# EAGLE board 3phasig_ATmega (EAGLE 6.1), part 1 of 2
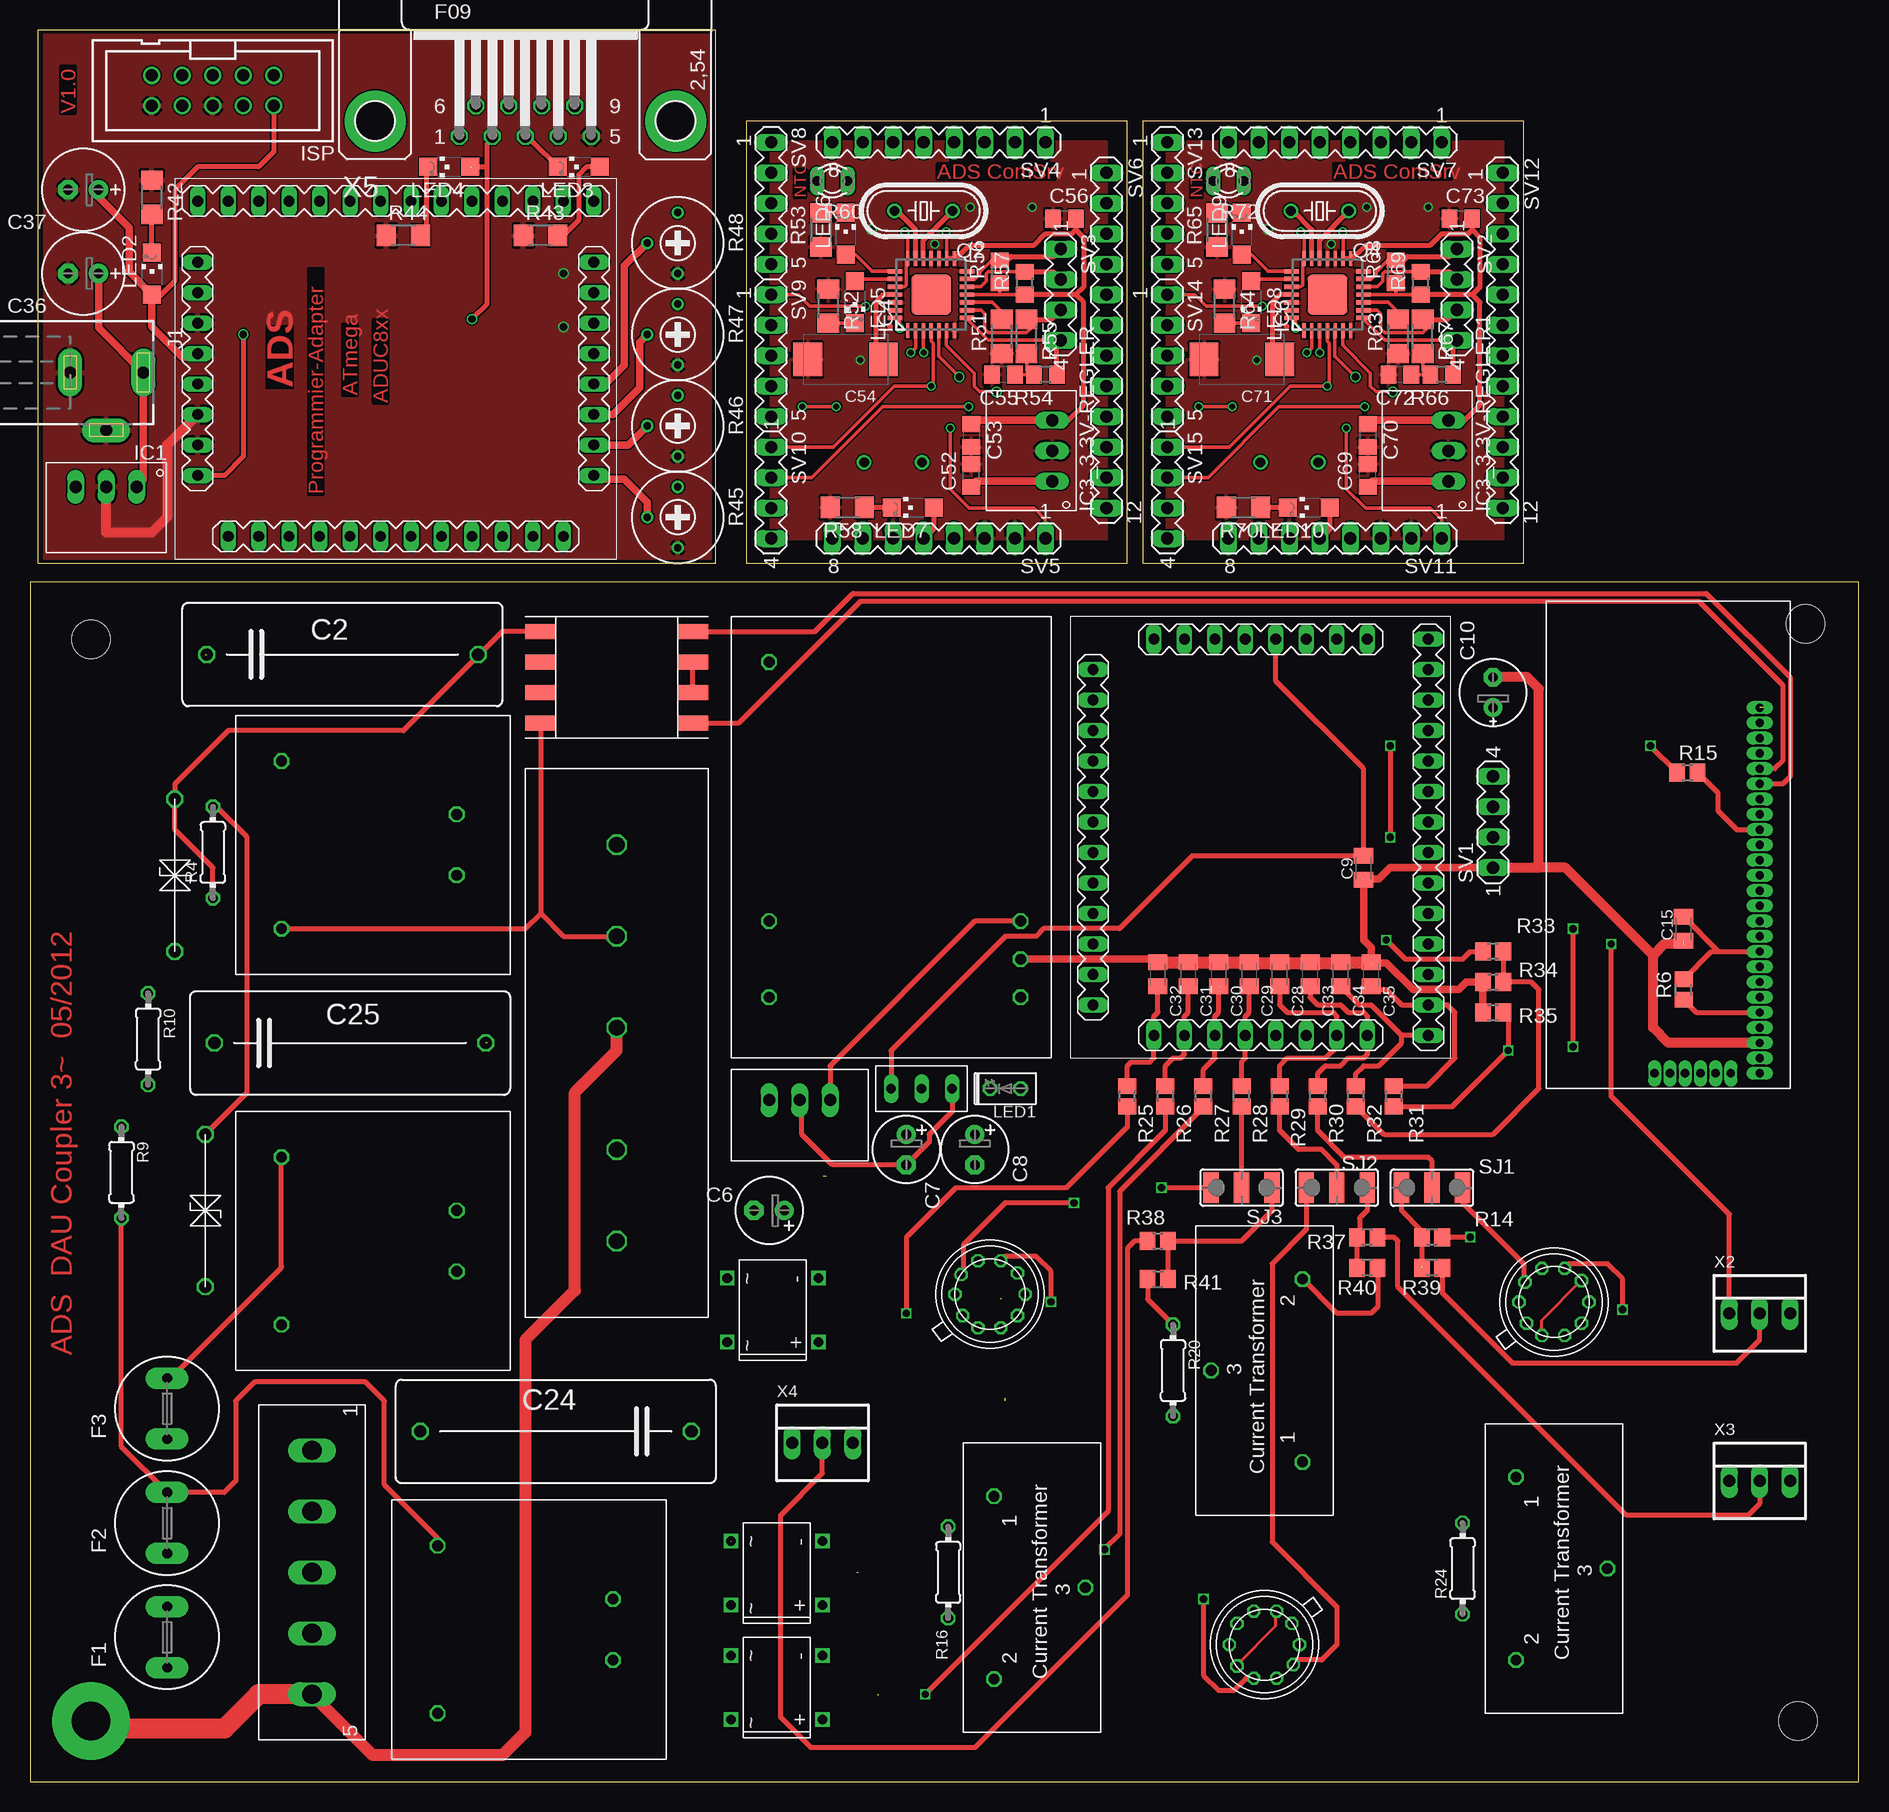
[diagram p0: board, top side]
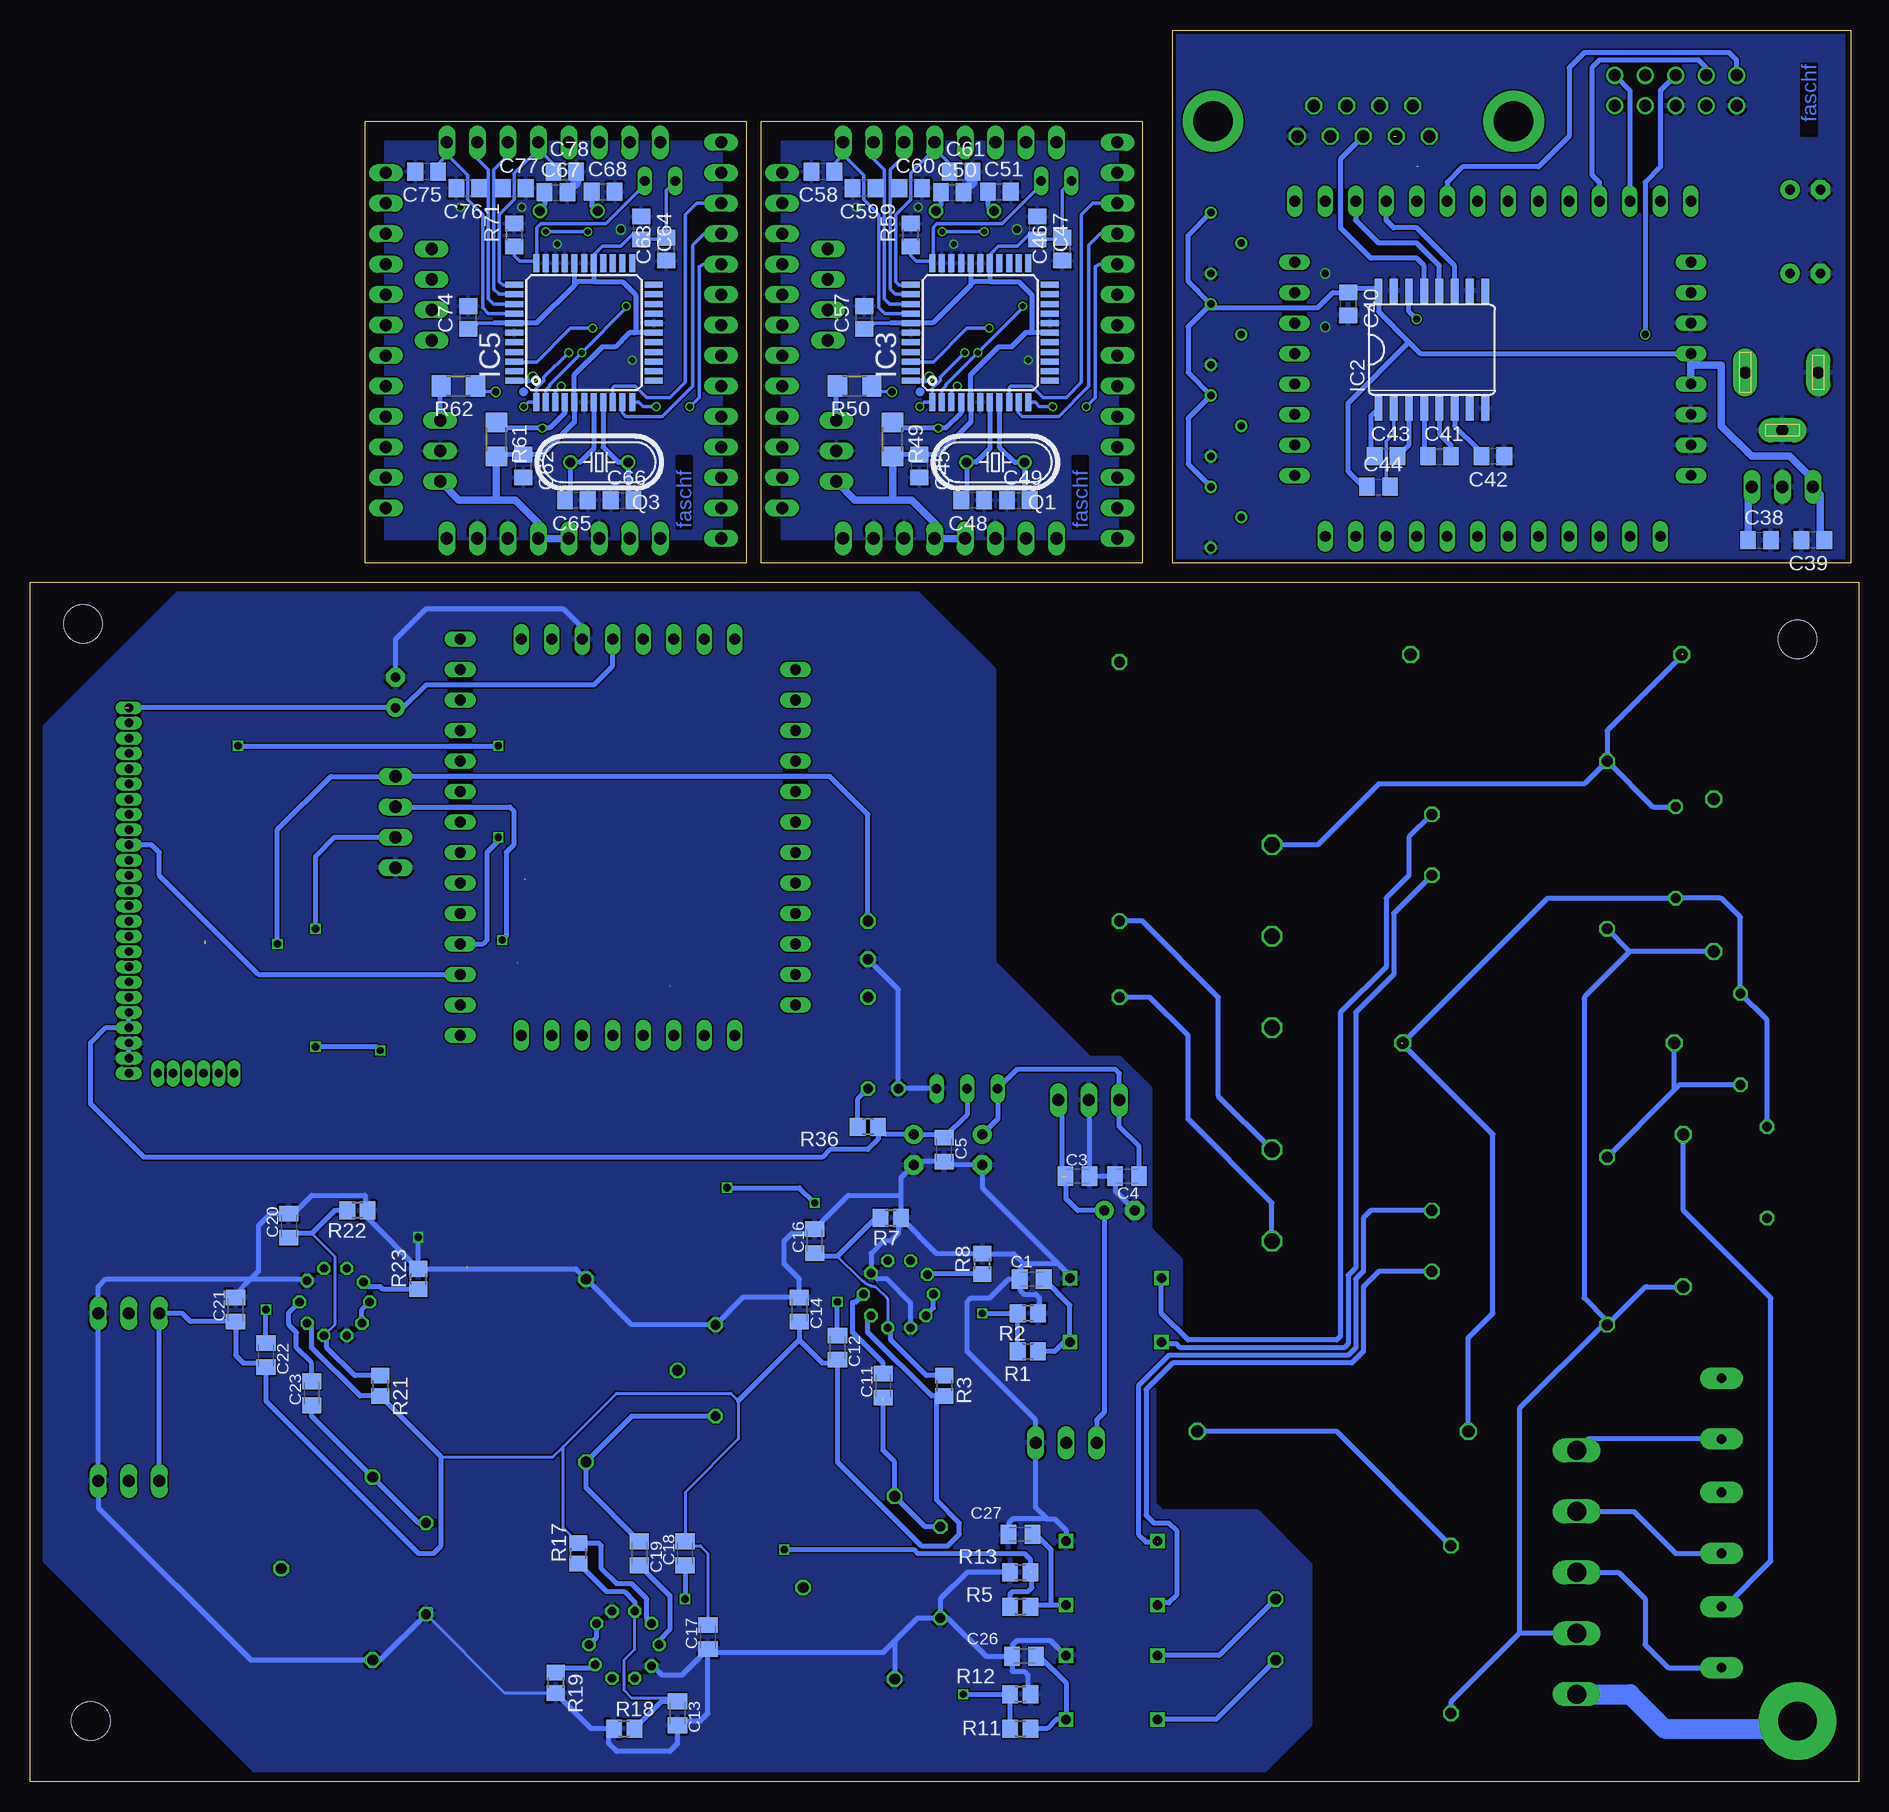
[diagram p1: board, bottom side, seen from below]

Size 152.38 x 146.03 mm. Coordinates in mm from the lower left corner, seen from the top.
Outline: 0,0 152.38,0 152.38,100 0,100 0,0
Outline: 91.44,138.43 59.69,138.43 59.69,101.6 91.44,101.6 91.44,138.43
Outline: 124.46,138.43 92.71,138.43 92.71,101.6 124.46,101.6 124.46,138.43
Outline: 57.15,101.6 57.15,146.03 0.65,146.03 0.65,101.6 57.15,101.6
Copper layers (1*16): Top 0.035mm / dielectric 1.5mm / Bottom 0.035mm
Design rules: minimum track width 0.125mm, minimum drill 0.2mm, track to track 0.125mm, track to pad 0.125mm, pad to pad 0.125mm, via to via 0.125mm, smd to smd 0.125mm, copper to edge 0.3mm, drill to drill 0.2mm, minimum pad ring 0.2mm, minimum via ring 0.125mm, stop-mask expansion 0.075mm, vias tented up to drill 0mil, thermal gap 0.2mm
Holes 3.2 mm at 147.96,96.52 147.32,5.08 5.08,95.25

## Footprints (pad centres in the part's own frame; a part is rotated, then mirrored left to right if it is on the bottom)
AC1010 = drill 0.9 octagon: P$1 20.32,8.89; P$2 5.08,8.89; P$3 12.7,1.27
C0805K = smd 1.3 x 1.6: 1 -1,0; 2 1,0
C225-087X268 = drill 1.016 octagon: 1 -11.303,0; 2 11.303,0
E2,5-6 = drill 0.813 pad 1.6: + -1.27,0 | drill 0.813 pad 1.6 octagon: - 1.27,0
E2,5-6E = drill 0.813 pad 1.575: + -1.27,0 | drill 0.813 pad 1.575 octagon: - 1.27,0
E2,5-7 = drill 0.813 pad 1.6: + -1.27,0 | drill 0.813 pad 1.6 octagon: - 1.27,0
C0805 = smd 1.3 x 1.5: 1 -0.95,0; 2 0.95,0
SMC_D = smd 2.4 x 2.8: + -3.15,0; - 3.15,0
TR5 = drill 0.813 pad 1.778 long: 1 -2.54,0; 2 2.54,0
RECOM_3POL = drill 1.016 long: 1 -2.54,0; 2 0,0; 3 2.54,0
SO16L = smd 0.66 x 2.032: 1 -4.445,-4.902; 2 -3.175,-4.902; 3 -1.905,-4.902; 4 -0.635,-4.902; 5 0.635,-4.902; 6 1.905,-4.902; 7 3.175,-4.902; 8 4.445,-4.902; 9 4.445,4.902; 10 3.175,4.902; 11 1.905,4.902; 12 0.635,4.902; 13 -0.635,4.902; 14 -1.905,4.902; 15 -3.175,4.902; 16 -4.445,4.902
TQFP44 = smd 1.5 x 0.5: 1 -5.8,4; 2 -5.8,3.2; 3 -5.8,2.4; 4 -5.8,1.6; 5 -5.8,0.8; 6 -5.8,0; 7 -5.8,-0.8; 8 -5.8,-1.6; 9 -5.8,-2.4; 10 -5.8,-3.2; 11 -5.8,-4; 23 5.8,-4; 24 5.8,-3.2; 25 5.8,-2.4; 26 5.8,-1.6; 27 5.8,-0.8; 28 5.8,0; 29 5.8,0.8; 30 5.8,1.6; 31 5.8,2.4; 32 5.8,3.2; 33 5.8,4 | smd 0.5 x 1.5: 12 -4,-5.8; 13 -3.2,-5.8; 14 -2.4,-5.8; 15 -1.6,-5.8; 16 -0.8,-5.8; 17 0,-5.8; 18 0.8,-5.8; 19 1.6,-5.8; 20 2.4,-5.8; 21 3.2,-5.8; 22 4,-5.8; 34 4,5.8; 35 3.2,5.8; 36 2.4,5.8; 37 1.6,5.8; 38 0.8,5.8; 39 0,5.8; 40 -0.8,5.8; 41 -1.6,5.8; 42 -2.4,5.8; 43 -3.2,5.8; 44 -4,5.8
QFN28_LONG_ERRLES = smd 1.27 x 0.35: 1 -3,1.95; 2 -3,1.3; 3 -3,0.65; 4 -3,0; 5 -3,-0.65; 6 -3,-1.3; 7 -3,-1.95; 15 3,-1.95; 16 3,-1.3; 17 3,-0.65; 18 3,0; 19 3,0.65; 20 3,1.3; 21 3,1.95 | smd 0.35 x 1.27: 8 -1.95,-3; 9 -1.3,-3; 10 -0.65,-3; 11 0,-3; 12 0.65,-3; 13 1.3,-3; 14 1.95,-3; 22 1.95,3; 23 1.3,3; 24 0.65,3; 25 0,3; 26 -0.65,3; 27 -1.3,3; 28 -1.95,3 | smd 3.302 x 3.302: EXP 0,0
PAK100/2500-10 = drill 1 pad 1.422: 1 -5.08,-1.27; 2 -5.08,1.27; 3 -2.54,-1.27; 4 -2.54,1.27; 5 0,-1.27; 6 0,1.27; 7 2.54,-1.27; 8 2.54,1.27; 9 5.08,-1.27; 10 5.08,1.27
DCJ0202 = drill 1 pad 2 long: 1 0,3.1; 2 4.8,0; 3 0,-3
LED2X5 = drill 0.813 octagon: A -1.27,0; K 1.27,0
CHIPLED_1206 = smd 1.5 x 1.5: A 0,-1.75; C 0,1.75
TSV = drill 1 octagon: P$1 -5.08,0; P$2 7.62,0
HC49/S = drill 0.813: 1 -2.413,0; 2 2.413,0
R0805 = smd 1.3 x 1.5: 1 -0.85,0; 2 0.85,0
0204/7 = drill 0.813 octagon: 1 -3.81,0; 2 3.81,0
R1206 = smd 1.6 x 1.803: 1 -1.422,0; 2 1.422,0
RTRIM3339P = drill 0.61: 1 -2.54,0; 2 0,-2.54; 3 2.54,0
R0805' = smd 1.3 x 1.5: 1 -0.95,0; 2 0.95,0
P640 = drill 0.813 long: 1 -1.27,0; 2 1.27,0
SJ_2W = smd 1.27 x 2.54: 1 -2.54,0; 2 0,0; 3 2.54,0
MA04-1 = drill 1.016 long: 1 -3.81,0; 2 -1.27,0; 3 1.27,0; 4 3.81,0
MA08-1 = drill 1.016 long: 1 -8.89,0; 2 -6.35,0; 3 -3.81,0; 4 -1.27,0; 5 1.27,0; 6 3.81,0; 7 6.35,0; 8 8.89,0
MA12-1 = drill 1.016 long: 1 -13.97,0; 2 -11.43,0; 3 -8.89,0; 4 -6.35,0; 5 -3.81,0; 6 -1.27,0; 7 1.27,0; 8 3.81,0; 9 6.35,0; 10 8.89,0; 11 11.43,0; 12 13.97,0
MA05-1 = drill 1.016 long: 1 -5.08,0; 2 -2.54,0; 3 0,0; 4 2.54,0; 5 5.08,0
RAC04_12SA = drill 0.9 octagon: +VO 25.4,24.13; GND 28.575,24.13; L 31.75,3.175; N 25.4,3.175; NC 3.81,3.175; NC1 31.75,24.13
TRAFO_0,35VA = drill 0.9 octagon: L 3.81,17.78; N 3.81,3.81; OUT1 18.415,13.335; OUT2 18.415,8.255
ADUC_MINIMUM = drill 0.9 long: ADC0 -9.207,-16.51; ADC1 -6.668,-16.51; ADC2 -4.128,-16.51; ADC3 -1.587,-16.51; ADC4 6.032,-16.51; ADC5 8.572,-16.51; ADC6 13.652,-16.51; ADC7 13.652,-13.97; ALE -14.287,6.35; DAC0 0.953,-16.51; DAC1 3.493,-16.51; GND 3.493,16.51; GND2 -4.128,16.51; GND3 -6.668,16.51; INT0 13.652,-6.35; MISO 13.652,-3.81; MOSI 13.652,11.43; P00 -14.287,3.81; P01 -14.287,1.27; P02 -14.287,-1.27; P03 -14.287,-3.81; P04 -14.287,-6.35; P05 -14.287,-8.89; P06 -14.287,-11.43; P07 -14.287,-13.97; P20 13.652,13.97; P21 13.652,16.51; P22 8.572,16.51; P23 6.032,16.51; P24 -9.207,16.51; P25 -14.287,13.97; P34 13.652,-1.27; P35 13.652,1.27; P36 13.652,3.81; P37 13.652,6.35; PWM0 -14.287,11.43; PWM1 -14.287,8.89; RXD 13.652,-11.43; SCLOCK 13.652,8.89; TXD 13.652,-8.89; VCC 0.953,16.51; VCC1 -1.587,16.51
MODEM_FUSS = drill 0.7 pad 0.813 long: P$1 -20.32,-8.89; P$2 -19.05,-8.89; P$3 -17.78,-8.89; P$4 -16.51,-8.89; P$5 -15.24,-8.89; P$6 -13.97,-8.89; P$7 -12.7,-8.89; P$8 -11.43,-8.89; P$9 -10.16,-8.89; P$10 -8.89,-8.89; P$11 -7.62,-8.89; P$12 -6.35,-8.89; P$13 -5.08,-8.89; P$14 -3.81,-8.89; P$15 -2.54,-8.89; P$16 -1.27,-8.89; P$17 0,-8.89; P$18 1.27,-8.89; P$19 2.54,-8.89; P$20 3.81,-8.89; P$21 5.08,-8.89; P$22 6.35,-8.89; P$23 7.62,-8.89; P$24 8.89,-8.89; P$25 10.16,-8.89; P$29 -20.32,-3.937; P$30 -20.32,-5.207; P$31 -20.32,-6.477 | drill 0.7 pad 0.61 long: P$26 -20.32,-0.127; P$27 -20.32,-1.397; P$28 -20.32,-2.667
PLC-UEBERTRAGER_V2 = smd 2.54 x 1.27: 1LINE1 6.35,3.81; 2 6.35,1.27; 3 6.35,-1.27; 4LINE2 6.35,-3.81; 6NC -6.35,1.27; 7NC -6.35,-1.27; 8N -6.35,-3.81; L5 -6.35,3.81
RECTIFIER = drill 0.8 square: + 6.858,7.62; - 1.524,7.62; ~1 1.524,0; ~2 6.858,0
RECOM785X = drill 1 long: GND 0,2.54; VIN -2.54,2.54; VOUT 2.54,2.54
TS1084_HOCH = drill 0.8 long: GND 0,0; IN 5.08,0; OUT 2.54,0
TO100_10PIN = drill 0.7 octagon: 1 2.794,-1.016; 2 2.794,0.889; 3 1.778,2.286; 4 0,2.921; 5 -1.778,2.286; 6 -2.794,0.889; 7 -2.794,-1.016; 8 -1.651,-2.413; 9 0,-2.921; 10 1.778,-2.286
NETZFILTER = drill 1.3 octagon: L 6.35,7.62; L' 39.37,7.62; N 13.97,7.62; N' 31.75,7.62; PE 21.59,7.62
CONNECTOR_5_POL = drill 1.6 long: P$1 3.81,4.445; P$2 8.89,4.445; P$3 13.97,4.445; P$4 19.05,4.445; P$5 24.13,4.445
22-23-2031 = drill 1 long: 1 -2.54,0; 2 0,0; 3 2.54,0
F09HP = drill 1.016 octagon: 1 -5.486,-1.27; 2 -2.743,-1.27; 3 0,-1.27; 4 2.743,-1.27; 5 5.486,-1.27; 6 -4.115,1.27; 7 -1.372,1.27; 8 1.372,1.27; 9 4.115,1.27 | drill 3.302 pad 5.08: G1 -12.522,0; G2 12.522,0

## Placement (x,y rotation side)
AC1002_1  AC1010  [AC1010]  89.22,3.49 90 top
C1  1µ  [C0805K]  68.9,41.91 180 bottom
C2  470n/270V  [C225-087X268]  26.04,93.98 0 top
C3  100n  [C0805K]  65.09,50.48 0 bottom
C4  100n  [C0805K]  60.96,50.48 180 bottom
C5  100n  [C0805K]  76.2,52.7 270 bottom
C6  4,7µ  [E2,5-6]  61.59,47.62 180 top
C7  4,7µ  [E2,5-6]  73.03,52.7 270 top
C8  4,7µ  [E2,5-6]  78.74,52.7 270 top
C9  100n  [C0805K]  111.12,76.2 90 top
C10  4µ7  [E2,5-6E]  121.92,90.81 90 top
C11  1µ  [C0805K]  81.28,33.02 90 bottom
C12  4µ7  [C0805K]  85.09,36.2 270 bottom
C13  1µ  [C0805K]  98.42,5.71 270 bottom
C14  1µ  [C0805K]  88.27,39.37 270 bottom
C15  1µ  [C0805K]  137.79,71.12 90 top
C16  1µ  [C0805K]  87,45.09 90 bottom
C17  1µ  [C0805K]  95.89,12.06 90 bottom
C18  4µ7  [C0805K]  97.79,19.05 90 bottom
C19  1µ  [C0805K]  101.6,19.05 270 bottom
C20  1µ  [C0805K]  130.81,46.35 90 bottom
C21  1µ  [C0805K]  135.25,39.37 90 bottom
C22  4µ7  [C0805K]  132.72,35.56 270 bottom
C23  1µ  [C0805K]  128.91,32.38 90 bottom
C24  470n/270V  [C225-087X268]  43.81,29.21 180 top
C25  470n/270V  [C225-087X268]  26.67,61.59 0 top
C26  1µ  [C0805K]  69.53,10.48 180 bottom
C27  1µ  [C0805K]  69.85,20.64 180 bottom
C28  100n  [C0805K]  104.14,67.31 90 top
C29  100n  [C0805K]  101.6,67.31 90 top
C30  100n  [C0805K]  99.06,67.31 90 top
C31  100n  [C0805K]  96.52,67.31 90 top
C32  100n  [C0805K]  93.98,67.31 90 top
C33  100n  [C0805K]  106.68,67.31 90 top
C34  100n  [C0805K]  109.22,67.31 90 top
C35  100n  [C0805K]  111.76,67.31 90 top
C36  10u  [E2,5-7]  4.45,125.73 180 top
C37  10u  [E2,5-7]  4.45,132.72 180 top
C38  100n  [C0805]  8.26,103.5 0 bottom
C39  100n  [C0805]  3.81,103.5 180 bottom
C40  100n  [C0805]  42.55,123.19 270 bottom
C41  100n  [C0805]  34.92,110.49 0 bottom
C42  100n  [C0805]  30.48,110.49 180 bottom
C43  100n  [C0805]  39.37,110.49 0 bottom
C44  100n  [C0805]  40.01,107.95 0 bottom
C45  100n  [C0805]  78.27,109.68 270 bottom
C46  100n  [C0805]  66.35,127.77 90 bottom
C47  100n  [C0805]  68.43,129.53 270 bottom
C48  22p  [C0805]  73.83,106.82 180 bottom
C49  22p  [C0805]  70.02,106.82 0 bottom
C50  22p  [C0805]  75.53,132.49 0 bottom
C51  22p  [C0805]  71.6,132.55 0 bottom
C52  100n  [C0805]  78.45,108.89 90 top
C53  100n  [C0805]  78.45,112.23 270 top
C54  10u  [SMC_D]  67.97,118.56 180 top
C55  10n  [C0805]  81.13,117.3 180 top
C56  10n  [C0805]  86.21,130.32 0 top
C57  100n  [C0805]  82.85,122.06 90 bottom
C58  10n  [C0805]  86.31,134.23 180 bottom
C59  10n  [C0805]  82.88,132.83 180 bottom
C60  10n  [C0805]  78.99,132.83 0 bottom
C61  10n  [C0805]  74.79,134.23 0 bottom
C62  100n  [C0805]  111.29,109.68 270 bottom
C63  100n  [C0805]  99.37,127.77 90 bottom
C64  100n  [C0805]  101.45,129.53 270 bottom
C65  22p  [C0805]  106.85,106.82 180 bottom
C66  22p  [C0805]  103.04,106.82 0 bottom
C67  22p  [C0805]  108.55,132.49 0 bottom
C68  22p  [C0805]  104.62,132.55 0 bottom
C69  100n  [C0805]  111.47,108.89 90 top
C70  100n  [C0805]  111.47,112.23 270 top
C71  10u  [SMC_D]  100.99,118.56 180 top
C72  10n  [C0805]  114.15,117.3 180 top
C73  10n  [C0805]  119.23,130.32 0 top
C74  100n  [C0805]  115.87,122.06 90 bottom
C75  10n  [C0805]  119.33,134.23 180 bottom
C76  10n  [C0805]  115.9,132.83 180 bottom
C77  10n  [C0805]  112.01,132.83 0 bottom
C78  10n  [C0805]  107.81,134.23 0 bottom
F1  T250mA/240V  [TR5]  11.43,12.06 90 top
F2  T250mA/240V  [TR5]  11.43,21.59 90 top
F3  T250mA/240V  [TR5]  11.43,31.11 90 top
IC1  78RECOM  [RECOM_3POL]  6.35,107.95 180 top
IC2  MAX3232CWE  [SO16L]  35.56,119.38 0 bottom
IC3  MEGA32-A  [TQFP44]  73.19,120.79 90 bottom
IC3_3.3V-REGLER  78RECOM  [RECOM_3POL]  85.18,110.95 90 top
IC3_3.3V-REGLER1  78RECOM  [RECOM_3POL]  118.2,110.95 90 top
IC4  ENC28J60QFN28_LONG_28  [QFN28_LONG_ERRLES]  75.1,123.97 90 top
IC5  MEGA32-A  [TQFP44]  106.21,120.79 90 bottom
IC6  ENC28J60QFN28_LONG_28  [QFN28_LONG_ERRLES]  108.12,123.97 90 top
ISP  2510-  [PAK100/2500-10]  15.24,140.97 180 top
J1  DCJ0202  [DCJ0202]  6.35,117.47 270 top
LED1  [LED2X5]  81.28,57.78 180 top
LED2  [CHIPLED_1206]  10.16,125.73 0 top
LED3  [CHIPLED_1206]  45.72,134.62 90 top
LED4  [CHIPLED_1206]  34.92,134.62 90 top
LED5  [CHIPLED_1206]  68.75,123.33 180 top
LED6  [CHIPLED_1206]  67.97,129.05 0 top
LED7  [CHIPLED_1206]  73.55,106.23 90 top
LED8  [CHIPLED_1206]  101.77,123.33 180 top
LED9  [CHIPLED_1206]  100.99,129.05 0 top
LED10  [CHIPLED_1206]  106.57,106.23 90 top
P6KE300CA  P6KE300CA  [TSV]  14.61,48.9 270 top
Q1  16MHz  [HC49/S]  71.92,110 180 bottom
Q2  25MHz  [HC49/S]  74.46,130.95 180 top
Q3  16MHz  [HC49/S]  104.94,110 180 bottom
Q4  25MHz  [HC49/S]  107.48,130.95 180 top
R1  82k  [R0805]  69.22,35.88 0 bottom
R2  33k  [R0805]  69.22,39.05 180 bottom
R3  22k  [R0805]  76.2,33.02 270 bottom
R4  470k  [0204/7]  15.24,77.47 90 top
R5  82k  [R0805]  69.85,14.61 0 bottom
R6  1M  [R0805]  137.79,66.04 90 top
R7  10k  [R0805]  80.64,46.99 180 bottom
R8  4k7  [R0805]  73.03,43.18 90 bottom
R9  470k  [0204/7]  7.62,50.8 270 top
R10  470k  [0204/7]  9.84,61.91 270 top
R11  82k  [R0805]  69.85,4.45 0 bottom
R12  33k  [R0805]  69.85,7.3 180 bottom
R13  33k  [R0805]  69.85,17.46 0 bottom
R14  220R/33k  [R0805]  116.84,45.4 180 top
R15  330R  [R0805]  138.11,84.14 0 top
R16  68R  [0204/7]  76.52,17.46 90 top
R17  22k  [R0805]  106.68,19.05 90 bottom
R18  10k  [R0805]  102.87,4.45 0 bottom
R19  4k7  [R0805]  108.58,8.26 270 bottom
R20  68R  [0204/7]  95.25,34.29 270 top
R21  22k  [R0805]  123.19,33.02 270 bottom
R22  10k  [R0805]  125.09,47.62 180 bottom
R23  4k7  [R0805]  120.02,41.91 90 bottom
R24  68R  [0204/7]  119.38,17.78 90 top
R25  10R  [R0805]  91.44,57.15 90 top
R26  10R  [R0805]  94.61,57.15 90 top
R27  10R  [R0805]  97.79,57.15 90 top
R28  10R  [R0805]  100.97,57.15 90 top
R29  10R  [R0805]  104.14,57.15 90 top
R30  10R  [R0805]  107.31,57.15 90 top
R31  10R  [R0805]  113.67,57.15 90 top
R32  10R  [R0805]  110.49,57.15 90 top
R33  680k  [R0805]  121.92,69.22 180 top
R34  470k  [R0805]  121.92,66.67 0 top
R35  220R  [R0805]  121.92,64.14 0 top
R36  330R  [R0805]  82.55,54.61 180 bottom
R37  0/82k  [R0805]  111.44,45.4 180 top
R38  0/82k  [R0805]  93.98,45.09 0 top
R39  0/82k  [R0805]  116.84,42.86 180 top
R40  220R/33k  [R0805]  111.44,42.86 180 top
R41  220R/33k  [R0805]  93.98,41.91 0 top
R42  220R  [R1206]  10.16,132.08 270 top
R43  1k2  [R1206]  42.55,128.91 0 top
R44  1k2  [R1206]  31.11,128.91 0 top
R45  100k  [RTRIM3339P]  53.98,105.41 270 top
R46  100k  [RTRIM3339P]  53.98,113.03 270 top
R47  100k  [RTRIM3339P]  53.98,120.65 270 top
R48  100k  [RTRIM3339P]  53.98,128.27 270 top
R49  10k  [R1206]  80.5,111.9 270 bottom
R50  10k  [R1206]  83.66,116.38 180 bottom
R51  2k2  [R1206]  80.98,120.48 90 top
R52  220R  [R1206]  66.53,123.02 270 top
R53  220R  [R1206]  65.9,129.37 90 top
R54  51R  [R0805']  84.62,117.3 180 top
R55  51R  [R1206]  83.04,120.48 270 top
R56  51R  [R0805']  80.81,125.87 90 top
R57  51R  [R0805']  82.89,124.92 90 top
R58  220R  [R1206]  68.1,106.23 180 top
R59  10k  [R0805']  78.99,128.94 90 bottom
R60  [P640]  66.86,133.45 180 top
R61  10k  [R1206]  113.52,111.9 270 bottom
R62  10k  [R1206]  116.68,116.38 180 bottom
R63  2k2  [R1206]  114,120.48 90 top
R64  220R  [R1206]  99.55,123.02 270 top
R65  220R  [R1206]  98.92,129.37 90 top
R66  51R  [R0805']  117.64,117.3 180 top
R67  51R  [R1206]  116.06,120.48 270 top
R68  51R  [R0805']  113.83,125.87 90 top
R69  51R  [R0805']  115.91,124.92 90 top
R70  220R  [R1206]  101.12,106.23 180 top
R71  10k  [R0805']  112.01,128.94 90 bottom
R72  [P640]  99.88,133.45 180 top
SJ1  [SJ_2W]  116.84,49.53 0 top
SJ2  [SJ_2W]  108.9,49.53 180 top
SJ3  [SJ_2W]  100.97,49.53 180 top
SV1  [MA04-1]  121.92,80.01 90 top
SV2  [MA04-1]  118.91,123.97 270 top
SV3  [MA04-1]  85.89,123.97 270 top
SV4  [MA08-1]  75.73,136.67 180 top
SV5  [MA08-1]  75.73,103.65 180 top
SV6  [MA12-1]  89.7,120.16 270 top
SV7  [MA08-1]  108.75,136.67 180 top
SV8  [MA05-1]  61.76,131.59 270 top
SV9  [MA05-1]  61.76,118.89 270 top
SV10  [MA04-1]  61.76,107.46 270 top
SV11  [MA08-1]  108.75,103.65 180 top
SV12  [MA12-1]  122.72,120.16 270 top
SV13  [MA05-1]  94.78,131.59 270 top
SV14  [MA05-1]  94.78,118.89 270 top
SV15  [MA04-1]  94.78,107.46 270 top
TSV2  TSV  [TSV]  12.06,76.83 270 top
U$1  RECOM_RAC04_12SA  [RAC04_12SA]  58.42,97.16 270 top
U$2  SICHERHEITSTRAFO  [TRAFO_0,35VA]  17.14,67.31 0 top
U$3  ADUC831_MINIMUM  [ADUC_MINIMUM]  102.87,78.74 0 top
U$4  MODEMSTECKER  [MODEM_FUSS]  135.25,79.38 90 top
U$5  PLC_UEBERTRAGER_V2  [PLC-UEBERTRAGER_V2]  48.9,92.08 0 top
U$6  MEGA32_COMSERVER  [ADUC_MINIMUM]  30.48,118.11 90 top
U$7  AC1010  [AC1010]  97.16,46.99 270 top
U$8  RECTIFIER  [RECTIFIER]  58.1,43.5 270 top
U$10  RECOM_785_05  [RECOM785X]  64.14,59.37 180 top
U$11  TS1084_HOCH  [TS1084_HOCH]  76.83,57.78 180 top
U$12  AD536  [TO100_10PIN]  102.87,11.43 90 top
U$13  AD536  [TO100_10PIN]  80.01,40.64 270 top
U$14  AC1010  [AC1010]  132.72,5.08 90 top
U$15  AD536  [TO100_10PIN]  127,40.01 270 top
U$16  SICHERHEITSTRAFO  [TRAFO_0,35VA]  30.16,1.91 0 top
U$17  RECTIFIER  [RECTIFIER]  58.42,12.06 270 top
U$18  SICHERHEITSTRAFO  [TRAFO_0,35VA]  17.14,34.29 0 top
U$19  RECTIFIER  [RECTIFIER]  58.42,21.59 270 top
U$20  NETZFILTER_05_A  [NETZFILTER]  41.27,84.45 270 top
X1  CONNECTO_5_POL  [CONNECTOR_5_POL]  19.05,31.43 270 top
X2  22-23-2031  [22-23-2031]  144.15,39.05 0 top
X3  22-23-2031  [22-23-2031]  144.15,25.08 0 top
X4  22-23-2031  [22-23-2031]  66.04,28.26 0 top
X5  [F09HP]  41.27,138.43 0 top

## Library data of the parts
AC1002_1 P6KE300CA TSV2 U$1 U$2 U$4 U$7 U$8 U$10-U$20 X1 = ADS
C1-C9 C11-C35 R1-R41 = resistor
C10 C36-C78 R42-R59 R61-R71 = rcl
F1-F3 = fuse; OC_FARNELL: unknown; OC_NEWARK: unknown
IC1 IC3_3.3V-REGLER IC3_3.3V-REGLER1 = linear
IC2 = maxim
IC3 IC5 = atmel
IC4 IC6 = microchip
ISP = con-3m
J1 = con-jack
LED1-LED10 = led
Q1-Q4 = crystal
R60 R72 = ptc-ntc
SJ1-SJ3 = jumper
SV1 = con-lstb; OC_FARNELL: unknown; OC_NEWARK: unknown
SV2-SV15 = con-lstb
U$3 U$6 = ADS_ADUCBoards
U$5 = ADS1
X2-X4 = con-molex; MF: MOLEX; MPN: 22-23-2031; OC_FARNELL: 1462950; OC_NEWARK: 30C0862
X5 = con-subd

## Nets
1_TD+: IC4.13 R56.2 SV3.1
1_TD+1: IC6.13 R68.2 SV2.1
2_TD-: IC4.12 R57.2 SV3.2
2_TD-1: IC6.12 R69.2 SV2.2
3_RD+: IC4.9 R55.1 SV3.3
3_RD+1: IC6.9 R67.1 SV2.3
6_RD-: IC4.8 R54.1 SV3.4
6_RD-1: IC6.8 R66.1 SV2.4
+3V3: C5.1 C8.+ R6.1 R36.1 U$4.P$4 U$4.P$5 U$11.OUT
+5V: C4.1 C7.+ C9.2 C10.+ U$3.VCC U$4.P$25 U$10.VOUT U$11.IN
+12V: C3.1 C6.+ C12.2 C14.2 C17.2 C18.2 C21.1 C22.2 R3.2 R17.2 R21.2 SV1.4 U$1.+VO U$10.VIN U$12.3 U$13.3 U$15.3 X2.1 X3.1 X4.1
ADC0: C32.1 R25.2 U$3.ADC0
ADC1: C31.1 R26.2 U$3.ADC1
ADC2: C30.1 R27.2 U$3.ADC2
ADC3: C29.1 R28.2 U$3.ADC3
ADC4: C28.1 R29.2 U$3.ADC4
ADC5: C33.1 R30.2 U$3.ADC5
ADC6: C58.1 IC3.37 SV4.1
ADC7: C59.1 IC3.36 SV4.2
ADC8: C60.1 IC3.35 SV4.3
ADC9: C61.1 IC3.34 SV4.4
ADC10: C75.1 IC5.37 SV7.1
ADC11: C76.1 IC5.36 SV7.2
ADC12: C77.1 IC5.35 SV7.3
ADC13: C78.1 IC5.34 SV7.4
GND: AC1002_1.P$2 C1.2 C3.2 C4.2 C5.2 C6.- C7.- C8.- C9.1 C10.- C13.2 C14.1 C15.1 C16.2 C17.1 C20.2 C21.2 C26.2 C27.2 C28.2 C29.2 C30.2 C31.2 C32.2 C33.2 C34.2 C35.2 LED1.K R2.1 R7.1 R8.2 R12.1 R13.1 R14.1 R16.1 R18.1 R19.2 R20.1 R22.1 R23.2 R24.1 R34.1 R35.1 R40.1 R41.1 SV1.1 U$1.GND U$3.GND U$4.P$2 U$4.P$3 U$7.P$2 U$8.- U$10.GND U$11.GND U$12.1 U$12.5 U$13.1 U$13.5 U$14.P$2 U$15.1 U$15.5 U$17.- U$19.- X2.3 X3.3 X4.3
GND1: C36.- C37.- C38.2 C39.2 C40.2 C42.1 IC1.2 IC2.8 IC2.10 IC2.15 ISP.6 ISP.10 J1.2 J1.3 R42.1 R43.1 R44.1 R45.3 R46.3 R47.3 R48.3 U$6.GND U$6.GND2 U$6.GND3 X5.5
GND2: C45.2 C46.1 C47.1 C48.1 C49.1 C50.2 C51.2 C52.2 C53.2 C54.- C55.2 C56.1 C57.2 C58.2 C59.2 C60.2 C61.2 IC3.6 IC3.18 IC3.28 IC3.30 IC3.31 IC3.32 IC3.39 IC3_3.3V-REGLER.2 IC4.7 IC4.14 IC4.17 IC4.18 IC4.26 R51.1 R52.1 R53.1 R58.2 R59.2 SV5.2 SV5.3 SV5.6
GND3: C62.2 C63.1 C64.1 C65.1 C66.1 C67.2 C68.2 C69.2 C70.2 C71.- C72.2 C73.1 C74.2 C75.2 C76.2 C77.2 C78.2 IC3_3.3V-REGLER1.2 IC5.6 IC5.18 IC5.28 IC5.30 IC5.31 IC5.32 IC5.39 IC6.7 IC6.14 IC6.17 IC6.18 IC6.26 R63.1 R64.1 R65.1 R70.2 R71.2 SV11.2 SV11.3 SV11.6
I1: R28.1 SJ3.2
I1INTERN: R8.1 SJ3.3 U$13.8
I2: R29.1 SJ2.2
I2INTERN: R19.1 SJ2.3 U$12.8
I3: R30.1 SJ1.2
I3INTERN: R23.1 SJ1.3 U$15.8
INT0: IC3.11 SV8.5
INT1: IC5.11 SV13.5
L1: C2.1 F1.2 P6KE300CA.P$1 R4.2 U$2.L U$20.L
L2: C24.1 F2.2 R9.2 U$16.L
L3: C25.1 F3.2 R10.2 U$18.L
MISO: IC3.2 IC4.2 SV9.1
MISO1: IC5.2 IC6.2 SV14.1
MOSI: IC3.1 IC4.3 SV10.2
MOSI1: IC5.1 IC6.3 SV15.2
N: P6KE300CA.P$2 TSV2.P$2 U$2.N U$5.8N U$16.N U$18.N U$20.N X1.P$4
N$1: R15.2 U$4.P$17
N$2: AC1002_1.P$1 C11.1 R16.2
N$3: C11.2 U$13.4
N$4: U$2.OUT1 U$8.~1
N$5: U$4.P$20 U$5.1LINE1
N$6: U$13.9 U$13.10
N$7: C1.1 R1.2 U$8.+
N$8: C35.1 R31.2 U$3.ADC7
N$9: U$2.OUT2 U$8.~2
N$10: C26.1 R11.2 U$17.+
N$11: U$16.OUT1 U$17.~1
N$12: U$16.OUT2 U$17.~2
N$13: U$4.P$21 U$5.4LINE2
N$14: R15.1 U$3.TXD
N$15: U$3.RXD U$4.P$16
N$16: U$1.L U$20.L'
N$17: C16.1 R3.1 R7.2 U$13.2
N$18: C36.+ C38.1 IC1.1 J1.1
N$19: LED1.A R36.2
N$20: C15.2 R6.2 U$4.P$9
N$21: C12.1 U$13.6
N$22: C19.1 R20.2 U$7.P$1
N$23: C19.2 U$12.4
N$24: U$12.9 U$12.10
N$25: C34.1 R32.2 U$3.ADC6
N$26: C2.2 C24.2 C25.2 R4.1 R9.1 R10.1 TSV2.P$1 U$5.L5
N$27: C13.1 R17.1 R18.2 U$12.2
N$28: ISP.1 U$6.MOSI
N$29: C18.1 U$12.6
N$30: C23.1 R24.2 U$14.P$1
N$31: C23.2 U$15.4
N$32: U$15.9 U$15.10
N$33: U$5.2 U$5.3
N$34: C27.1 R5.2 U$19.+
N$35: U$18.OUT1 U$19.~1
N$36: U$18.OUT2 U$19.~2
N$37: R33.2 SV1.3
N$38: C20.1 R21.1 R22.2 U$15.2
N$39: ISP.5 U$6.P24
N$40: C22.1 U$15.6
N$41: U$1.N U$20.N'
N$42: R37.2 R40.2 SJ2.1
N$43: R37.1 X3.2
N$45: R14.2 R39.2 SJ1.1
N$46: F1.1 X1.P$3
N$47: F2.1 X1.P$2
N$48: F3.1 X1.P$1
N$49: R32.1 R33.1 R34.2
N$50: R31.1 R35.2 SV1.2
N$53: R39.1 X2.2
N$54: R38.2 R41.2 SJ3.1
N$55: R38.1 X4.2
N$56: ISP.7 U$6.SCLOCK
N$57: ISP.9 U$6.MISO
N$58: IC2.12 U$6.RXD
N$59: IC2.11 U$6.TXD
N$60: C44.2 IC2.2
N$61: C42.2 IC2.6
N$62: C43.1 IC2.1
N$63: C43.2 IC2.3
N$64: C41.1 IC2.4
N$65: C41.2 IC2.5
N$66: IC2.14 LED4.A X5.2
N$67: LED2.C R42.2
N$68: IC2.13 LED3.C X5.3
N$69: LED3.A R43.2
N$70: LED4.C R44.2
N$71: R45.2 U$6.ADC0
N$72: R46.2 U$6.ADC1
N$73: R47.2 U$6.ADC2
N$74: R48.2 U$6.ADC3
N$75: C49.2 IC3.8 Q1.1
N$76: C48.2 IC3.7 Q1.2
N$77: C50.1 IC4.19 Q2.1
N$78: C51.1 IC4.20 Q2.2
N$79: C54.+ IC4.25
N$80: IC3.42 IC4.28
N$81: IC4.6 R50.1
N$82: IC4.10 R51.2
N$83: LED5.C R52.2
N$84: IC4.23 LED5.A
N$85: IC4.22 LED6.A
N$86: LED6.C R53.2
N$87: C55.1 R54.2 R55.2
N$88: LED7.C R58.1
N$89: IC3.33 R59.1 R60.1
N$90: C66.2 IC5.8 Q3.1
N$91: C65.2 IC5.7 Q3.2
N$92: C67.1 IC6.19 Q4.1
N$93: C68.1 IC6.20 Q4.2
N$94: C71.+ IC6.25
N$95: IC5.42 IC6.28
N$96: IC6.6 R62.1
N$97: IC6.10 R63.2
N$98: LED8.C R64.2
N$99: IC6.23 LED8.A
N$100: IC6.22 LED9.A
N$101: LED9.C R65.2
N$102: C72.1 R66.2 R67.2
N$103: LED10.C R70.1
N$104: IC5.33 R71.1 R72.1
PE: U$20.PE X1.P$5
RESET: IC3.4 R49.1 SV5.1
RESET1: IC5.4 R61.1 SV11.1
RXD: IC3.9 SV8.3
RXD1: IC5.9 SV13.3
SCK: IC3.3 IC4.4 SV10.1
SCK1: IC5.3 IC6.4 SV15.1
SS: IC3.44 IC4.5
SS1: IC5.44 IC6.5
TXD: IC3.10 SV8.4
TXD1: IC5.10 SV13.4
U1: R1.1 R2.2 R25.1
U2: R11.1 R12.2 R26.1
U3: R5.1 R13.2 R27.1
VCC: C37.+ C39.1 C40.1 C44.1 IC1.3 IC2.16 ISP.2 LED2.A R45.1 R46.1 R47.1 R48.1 U$6.VCC U$6.VCC1
VCC_3V: C53.1 C56.2 IC3_3.3V-REGLER.3 IC4.11 IC4.15 IC4.16 IC4.21 IC4.24 R50.2 R56.1 R57.1
VCC_3V1: C70.1 C73.2 IC3_3.3V-REGLER1.3 IC6.11 IC6.15 IC6.16 IC6.21 IC6.24 R62.2 R68.1 R69.1
VCC_5V: C45.1 C46.2 C47.2 C52.1 C57.1 IC3.5 IC3.17 IC3.27 IC3.29 IC3.38 IC3_3.3V-REGLER.1 LED7.A R49.2 R60.2 SV5.4 SV5.5
VCC_5V1: C62.1 C63.2 C64.2 C69.1 C74.1 IC3_3.3V-REGLER1.1 IC5.5 IC5.17 IC5.27 IC5.29 IC5.38 LED10.A R61.2 R72.2 SV11.4 SV11.5